# Altium PCB MidaSatsEPS.PcbDoc
Units mm, origin at the board's own origin, x right, y up, seen from the top; angles counter-clockwise.
Board outline 95.02 x 95 mm, 2 copper layers (Top Layer, Bottom Layer); 7 components, 5 nets, 44 pads, 0 vias.
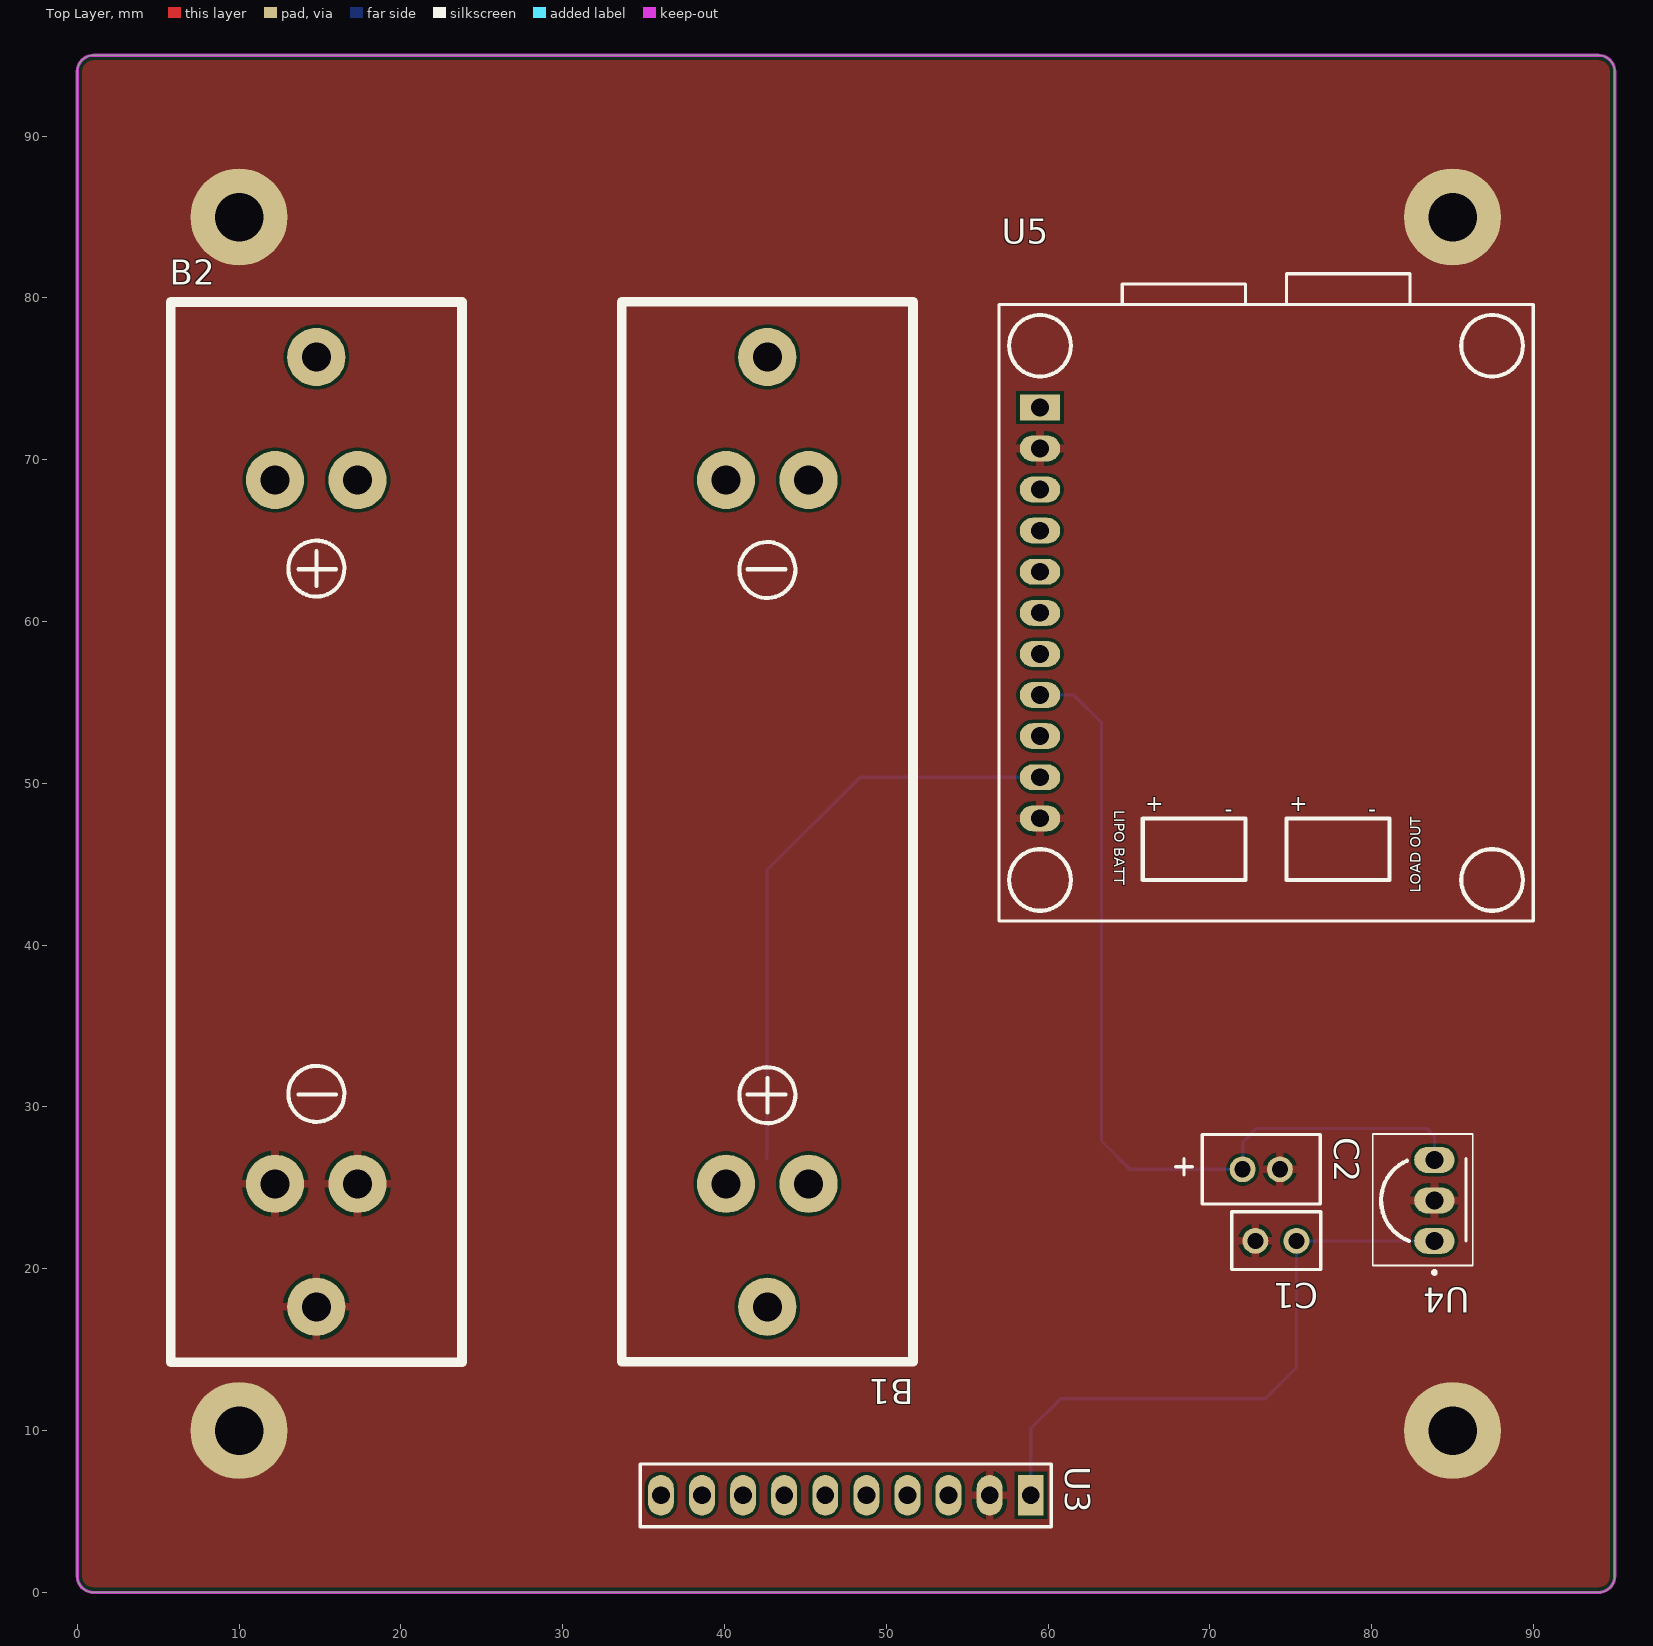
[diagram p0: Top Layer view]
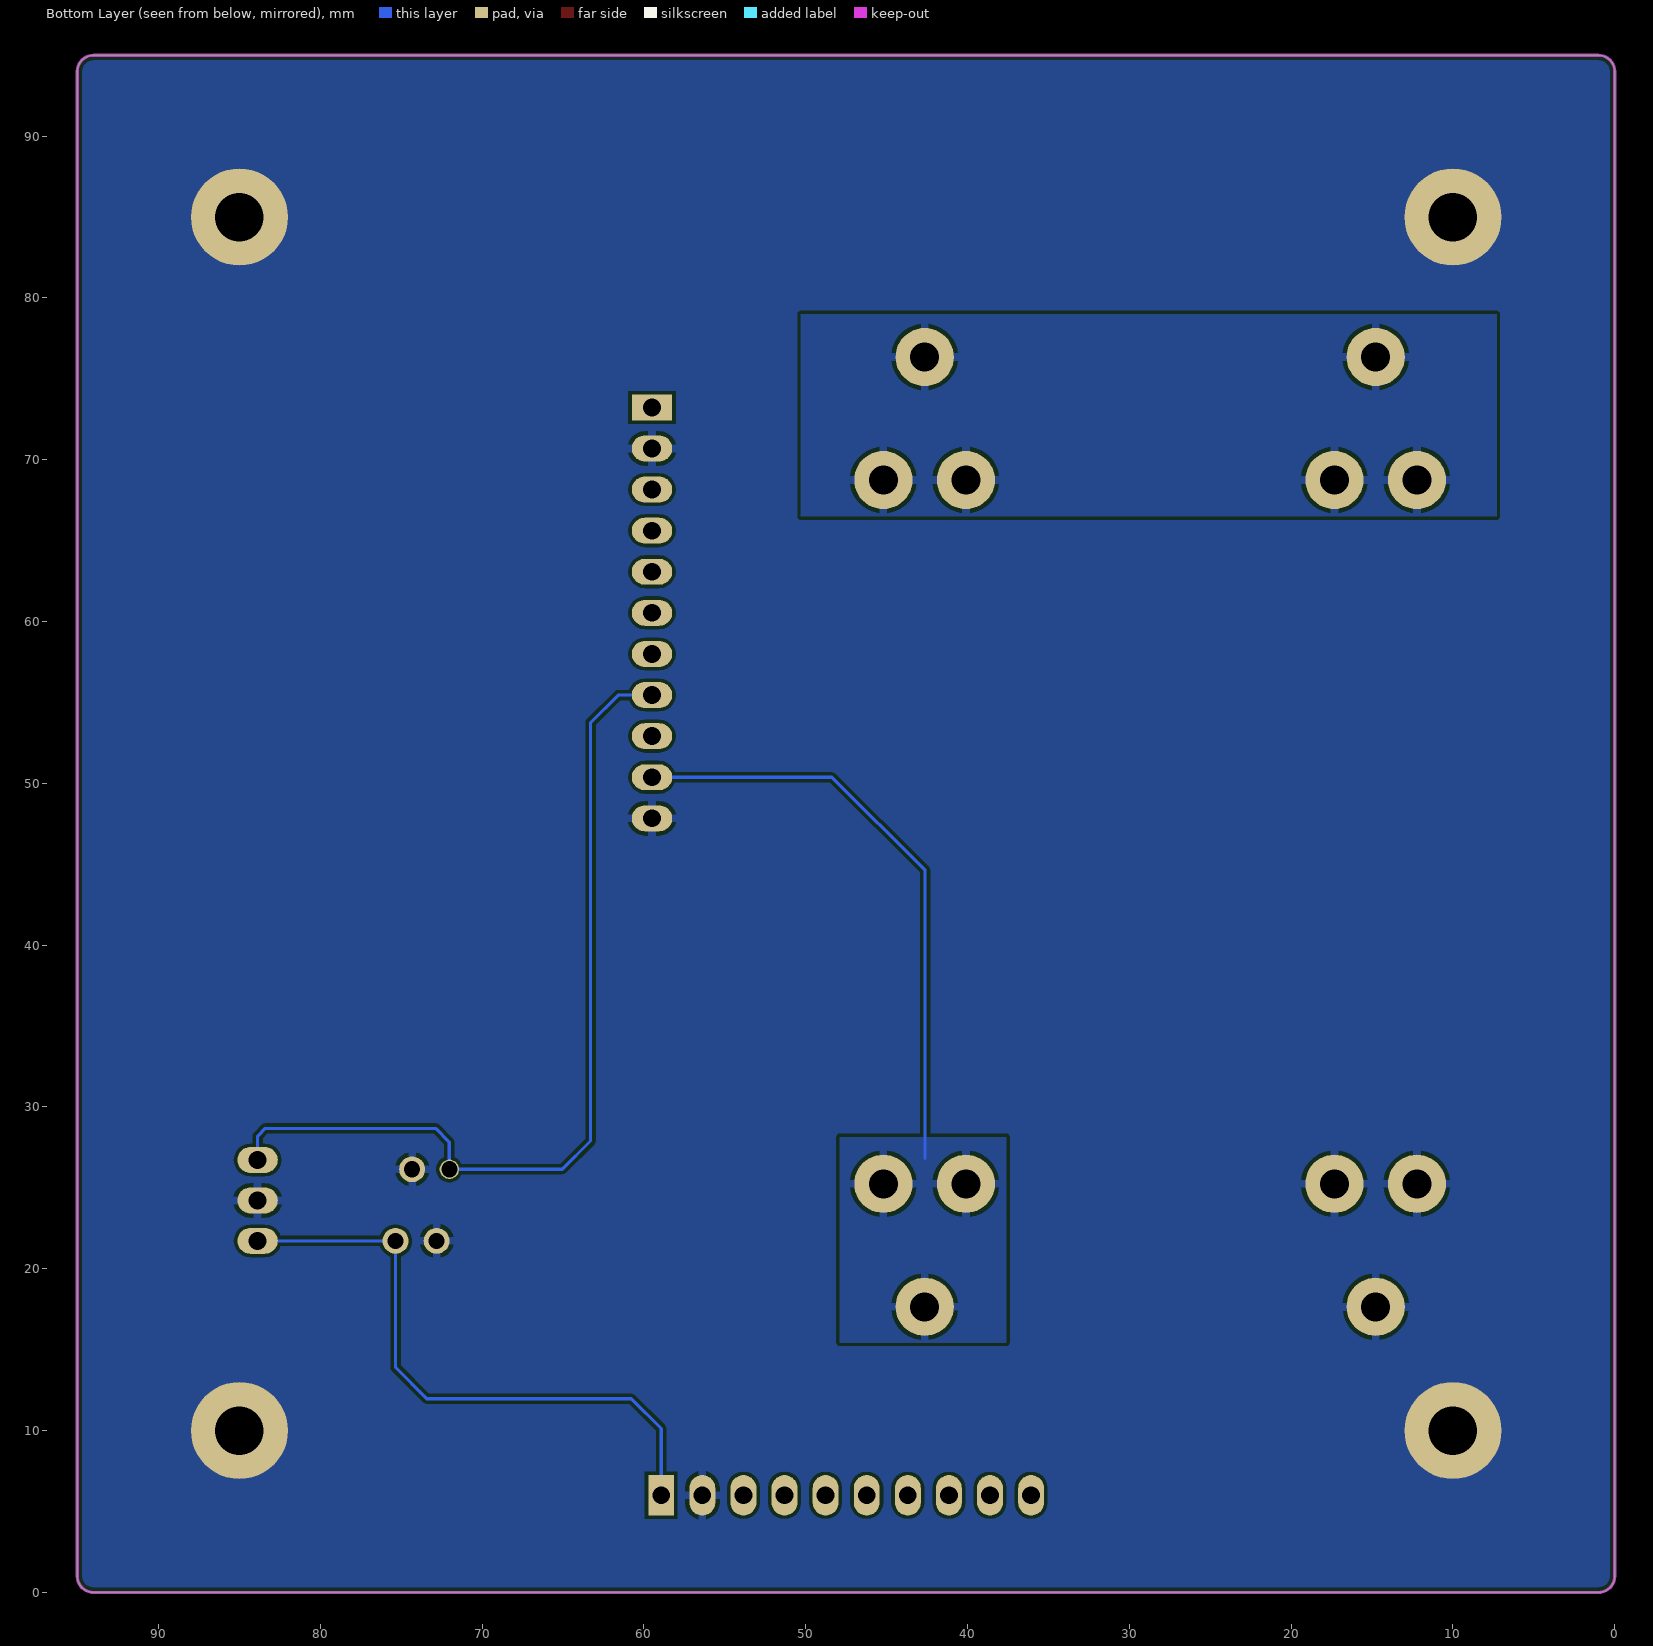
[diagram p1: Bottom Layer view, seen from below]

## Layer stack, top to bottom
Top Solder: solder mask 0.0102, Solder Resist, Dk 3.5
Top Layer: signal copper 0.0356
Dielectric 1: dielectric 0.32, FR-4, Dk 4.8
Bottom Layer: signal copper 0.0356
Bottom Solder: solder mask 0.0102, Solder Resist, Dk 3.5

## Board outline
0,1 0,94 cw(c1,94) 1,95 94.02,95 cw(c94.02,94) 95.02,94 95.02,1 cw(c94.02,1) 94.02,0 1,0 cw(c1,1)

## Design rules (kind name [scope] priority, off if disabled: settings)
BoardOutlineClearance [All] p1: gap=0.2 ignorepadtopadclearanceinfootprint=FALSE except(0.4: Arc-SplitBarrior Arc-SplitContinuation Track-SplitBarrior Track-SplitContinuation SMDPad-SplitBarrior SMDPad-SplitContinuation THPad-SplitBarrior THPad-SplitContinuation Via-SplitBarrior Via-SplitContinuation Fill-SplitBarrior Fill-SplitContinuation Poly-SplitBarrior Poly-SplitContinuation Region-SplitBarrior Region-SplitContinuation Text-SplitBarrior Text-SplitContinuation)
Clearance "Clearance Bottom Layer" [OnLayer('Bottom Layer')] p1: gap=0.203 ignorepadtopadclearanceinfootprint=TRUE except(0.254: Arc-Text Track-Text SMDPad-Text THPad-Text Via-Text Fill-Text Poly-Text Region-Text Text-Text)
Clearance "Clearance Top Layer" [OnLayer('Top Layer')] p2: gap=0.203 ignorepadtopadclearanceinfootprint=TRUE except(0.254: Arc-Text Track-Text SMDPad-Text THPad-Text Via-Text Fill-Text Poly-Text Region-Text Text-Text)
Clearance Clearance_1 [OnMid vs OnMid] p3: gap=0.254 ignorepadtopadclearanceinfootprint=FALSE except(0: Arc-Hole Track-Hole SMDPad-Hole THPad-Hole Via-Hole Fill-Hole Poly-Hole Region-Hole Text-Hole)
Clearance Clearance_2 [(ExistsOnLayer('Top Layer') Or ExistsOnLayer('Bottom Layer')) vs (ExistsOnLayer('Top Layer') Or ExistsOnLayer('Bottom Layer'))] p4: gap=0.254 ignorepadtopadclearanceinfootprint=FALSE except(0: Arc-Hole Track-Hole SMDPad-Hole THPad-Hole Via-Hole Fill-Hole Poly-Hole Region-Hole Text-Hole)
Clearance [All] p5: gap=0.2 ignorepadtopadclearanceinfootprint=FALSE except(0.089: Arc-Arc Arc-Track Arc-SMDPad Track-Track Track-SMDPad SMDPad-SMDPad; 0.127: Arc-Via Track-Via SMDPad-Via THPad-Via Via-Via; 0.254: Arc-Text Track-Text SMDPad-Text THPad-Text Via-Text Fill-Text Poly-Text Region-Text Text-Text)
HoleSize [All] p1: absolutevalues=TRUE maxlimit=6.3 minlimit=0.2 maxpercent=80.000 minpercent=20.000
MinimumAnnularRing [All] p1: minimumring=0.076
MinimumSolderMaskSliver [All] p1: minsoldermaskwidth=0.1
PolygonConnect PolygonConnect_1 [All] p1: thpad.connectstyle=Relief thpad.reliefconductorwidth=0.508 thpad.reliefentries=4 thpad.polygonreliefangle="90 Angle" thpad.airgapwidth=0.254 smdpad.connectstyle=Relief smdpad.reliefconductorwidth=0.508 smdpad.reliefentries=4 smdpad.polygonreliefangle="90 Angle" smdpad.airgapwidth=0.254 via.connectstyle=Direct via.reliefconductorwidth=0.508 via.reliefentries=4 via.polygonreliefangle="90 Angle" via.airgapwidth=0.254
RoutingCorners [All] p1: cornerstyle=Round minsetback=2.54 maxsetback=2.54
RoutingVias [All] p1: holewidth=0.5 width=1 viastyle="Through Hole" minholewidth=0.2 minwidth=0.45 maxholewidth=1 maxwidth=2
SilkToSilkClearance [All] p1: silktosilkclearance=0.1
SilkToSolderMaskClearance [IsPad] p1: minsilkscreentomaskgap=0.1 clearancetoexposedcopper=TRUE
SolderMaskExpansion [All] p1: expansion=0.102 istentingtop=FALSE
Width [All] p1: maxlimit=2.54 minlimit=0.089 preferedwidth=0.381
25 further rules are at their usual default settings.

## Components (designator, comment, footprint, x,y, rotation, side; value= is the part's Value field where it differs from the comment)
B1 "Keystone 54" "Keystone 54" 42.65,47 r180 top
B2 "Keystone 54" "Keystone 54" 14.775,47 r0 top
C1 "CAP 2.2UF" FA16X7R1E225KNU06 74.08,21.725 r180 top
C2 "CAP1UF" C330C105K5R5TA7301 73.175,26.15 r0 top value=1uF
U3 "Stackable Pin Bus" STACKABLE_PIN_BUS 47.5,6 r270 top
U4 "IC REG 5V" AP7381-50V-A 83.875,21.725 r180 top
U5 "BATT CHARG" 4755 59.5,73.24 r0 top

## Footprints (in the part's own frame and the unit in brackets; to place one, negate y for a bottom-side part, rotate by r counter-clockwise, add the part's x,y. Pads: shape width x height; smd on the part's side, far side on the other; paste and mask are expansions set on the pad)
4755 [mm]
  rect 2.5x1.6 hole 1.1: 1(0,0)
  oval 2.5x1.6 hole 1.1: 2(0,-2.54) 3(0,-5.08) 4(0,-7.62) 5(0,-10.16) 6(0,-12.7) 7(0,-15.24) 8(0,-17.78) 9(0,-20.32) 10(0,-22.86) 11(0,-25.4)
  silkscreen extent -2.54,-31.75 30.48,8.25, body extent -2.54,-31.8 30.48,9.37, height 12.57
AP7381-50V-A [mm]
  oval 2.5x1.6 hole 1.1: 1(0,0) 2(0,-2.5) 3(0,-5)
  silkscreen extent -2.37,-6.6 3.81,2.03, body extent -1.37,-5.2 2.29,0.2, height 9.83
C330C105K5R5TA7301 [mm]
  round 1.6 / inner round 1.6 / far side round 1.2 hole 1: 1(-1.15,0)
  round 1.6 hole 1: 2(1.15,0)
  silkscreen extent -5.28,-2.15 3.65,2.15, body extent -3.56,-2.04 3.55,2.04, height 7.23
FA16X7R1E225KNU06 [mm]
  round 1.6 hole 1: 1(-1.27,0) 2(1.27,0)
  silkscreen extent -2.77,-1.8 2.73,1.78, body extent -2.75,-1.75 2.75,1.75, height 4.5
"Keystone 54" [mm]
  round 3.6 hole 1.8: 1(-2.55,21.75) 1(0,29.35) 1(2.55,21.75) 2(-2.55,-21.75) 2(0,-29.35) 2(2.55,-21.75)
  silkscreen extent -9,-32.77 9,32.75, body extent -9.13,-32.93 9,32.91, height 18.3
STACKABLE_PIN_BUS [mm]
  rect 2.5x1.6 hole 1.1: 1(0,11.43)
  oval 2.5x1.6 hole 1.1: 2(0,8.89) 3(0,6.35) 4(0,3.81) 5(0,1.27) 6(0,-1.27) 7(0,-3.81) 8(0,-6.35) 9(0,-8.89) 10(0,-11.43)
  silkscreen extent -1.94,-12.7 1.95,12.7, body extent -1.25,-12.69 1.29,12.71, height 8

## Part data
B1 B2: library part 54, "Batteries/Accessories / BATT CONT CLIP 18650 1CEL PC PIN", Manufacturer="Keystone Electronics", Supplier Part Number=36-54-ND, Category="Batteries and Accessories", ComponentLink1Description=https://datasheet.ciiva.com:443/pdfs/VipMasterIC/IC/KEYC/KEYC-S-A0001371036/KEYC-S-A0001371130-1.pdf?src-supplier=IHS+Markit, ComponentLink1URL=https://datasheet.ciiva.com:443/pdfs/VipMasterIC/IC/KEYC/KEYC-S-A0001371036/KEYC-S-A0001371130-1.pdf?src-supplier=IHS+Markit, ComponentLink2Description=http://www.farnell.com/datasheets/1898890.pdf?src-supplier=Farnell, ComponentLink2URL=http://www.farnell.com/datasheets/1898890.pdf?src-supplier=Farnell, ComponentLink3Description=http://keyelco.com/userAssets/file/M65p11.pdf?src-supplier=Digikey, ComponentLink3URL=http://keyelco.com/userAssets/file/M65p11.pdf?src-supplier=Digikey, ComponentLink4Description=http://www.farnell.com/datasheets/1898890.pdf?src-supplier=Newark, ComponentLink4URL=http://www.farnell.com/datasheets/1898890.pdf?src-supplier=Newark, Manufacturer Part Number=54, Pricing="1=0,69, 25=0,5828, 100=0,55, 250=0,51576, 500=0,4587, 1000=0,3893, 2500=0,35554, 5000=0,32854 (USD)", RoHS=Yes, Stock=21286, Supplier=Digikey
C1: library part FA16X7R1E225KNU06, "Ceramic Capacitor, Multilayer, Ceramic, 25V, 10% +Tol, 10% -Tol, X7R, 15% TC, 2.2uF, Through Hole Mount", Capacitor Type=Ceramic, Manufacturer=TDK, Supplier Part Number=445-180433-1-ND, Category="Ceramic Capacitors", ComponentLink1Description=https://datasheet.ciiva.com:443/pdfs/VipMasterIC/IC/TDKC/TDKC-S-A0009903855/TDKC-S-A0009903855-1.pdf?src-supplier=IHS+Markit, ComponentLink1URL=https://datasheet.ciiva.com:443/pdfs/VipMasterIC/IC/TDKC/TDKC-S-A0009903855/TDKC-S-A0009903855-1.pdf?src-supplier=IHS+Markit, ComponentLink2Description=https://product.tdk.com/info/en/catalog/datasheets/leadmlcc_halogenfree_fa_en.pdf?src-supplier=Digikey, ComponentLink2URL=https://product.tdk.com/info/en/catalog/datasheets/leadmlcc_halogenfree_fa_en.pdf?src-supplier=Digikey, Dielectric Material=Ceramic, Manufacturer Part Number=FA16X7R1E225KNU06, Pins=2, Pricing="1=0,5, 10=0,332, 50=0,2448, 100=0,1993, 500=0,15736, 1000=0,13288 (USD)", Reach SVHC Compliant=Yes, RoHS=Yes, RoHS Compliant=Yes, Stock=7883, Supplier=Digikey
C2: library part C330C105K5R5TA7301, "Ceramic Capacitor, Multilayer, Ceramic, 50V, 10% +Tol, 10% -Tol, X7R, 15% TC, 1uF, Through Hole Mount", Capacitor Type=Ceramic, Case/Package=3015, Manufacturer=KEMET, Max Operating Temperature=125°C, Min Operating Temperature=-55°C, Package Shape=Rectangular, Package Style=RadialMeter, Rated DC Voltage (URdc)=50V, Supplier Part Number=399-9886-1-ND, Temperature Characteristics Code=X7R, Tolerance  (fill in as +-)=10%, Category="Ceramic Capacitors", ComponentLink1Description=https://datasheet.ciiva.com:443/pdfs/VipMasterIC/IC/KEME/KEME-S-A0009782347/KEME-S-A0009782347-1.pdf?src-supplier=IHS+Markit, ComponentLink1URL=https://datasheet.ciiva.com:443/pdfs/VipMasterIC/IC/KEME/KEME-S-A0009782347/KEME-S-A0009782347-1.pdf?src-supplier=IHS+Markit, ComponentLink2Description=https://datasheet.ciiva.com/6278/f3101-goldmax-6278031.pdf?src-supplier=Digikey, ComponentLink2URL=https://datasheet.ciiva.com/6278/f3101-goldmax-6278031.pdf?src-supplier=Digikey, Dielectric Material=Ceramic, Height=9.14mm, JESD-609 Code=e3, Length=7.62mm, Manufacturer Part Number=C330C105K5R5TA7301, Mounting Technology="Through Hole", Multilayer=Yes, Packaging="Tape and Reel", Pins=2, Pricing="1=0,48, 10=0,322, 50=0,2562, 100=0,2115, 500=0,16524 (USD)", Reach SVHC Compliant=Yes, RoHS=Yes, RoHS Compliant=Yes, Stock=95810, Supplier=Digikey, Terminal Finish=Nickel, Terminal Pitch=5.08mm, Termination=Wire, Tolerance (fill in as +-)=10%, Width=3.81mm
U3: library part "Barramento Empilhável", "10 pinos, Passo 2.54mm, Dimensões da barra 26x2x8mm"
U4: library part AP7381-50V-A, "Fixed Positive LDO Regulator", Manufacturer=Diodes, Peak Reflow Temperature (Cel)=260°C, Supplier Part Number=AP7381-50V-ADICT-ND, Time @ Peak Reflow Temperature-Max (s)=30s, ComponentLink1Description=https://datasheet.ciiva.com:443/pdfs/VipMasterIC/IC/DIOD/DIOD-S-A0009691348/DIOD-S-A0009865550-1.pdf?src-supplier=IHS+Markit, ComponentLink1URL=https://datasheet.ciiva.com:443/pdfs/VipMasterIC/IC/DIOD/DIOD-S-A0009691348/DIOD-S-A0009865550-1.pdf?src-supplier=IHS+Markit, ComponentLink2Description=https://www.diodes.com/assets/Datasheets/AP7381.pdf?src-supplier=Digikey, ComponentLink2URL=https://www.diodes.com/assets/Datasheets/AP7381.pdf?src-supplier=Digikey, Manufacturer Part Number=AP7381-50V-A, Pricing="1=0,46, 10=0,374, 25=0,3424, 100=0,2547, 250=0,2308, 500=0,19102, 1000=0,14326 (USD)", Reach SVHC Compliant=Yes, Regulator Type="FIXED POSITIVE SINGLE OUTPUT LDO REGULATOR", RoHS=Yes, RoHS Compliant=Yes, Stock=6439, Supplier=Digikey
U5: library part 4755, Manufacturer="Adafruit Industries", Supplier Part Number=1528-4755-ND, Manufacturer Part Number=4755, Pricing="1=14,95 (USD)", RoHS=No, Stock=308, Supplier=Digikey

## Free pads (board coordinates)
  round 6 hole 3: GND(10,10) GND(10,85) GND(85,10) GND(85,85)

## Nets (pads, with @x,y where several pads share a name; then routed paths per layer and width w, separated by ;. In a path a pad name is that pad's centre, name@x,y a point inside that pad or via, vN(x,y) a via of type N, cw(c..) or ccw(c..) an arc to the next point about the centre after c; other vN are vias at no path point)
"BAT CONN": B1.2 B2.1
GND: B2.2 C1.2 C2.2 pad.GND U3.2 U4.2 U5.2 U5.11
VBAT: B1.1 U5.10 | length 37.1
  Bottom Layer w0.2: 42.625,26.825 42.625,44.625 48.38,50.38 U5.10
VCC: C2.1 U4.3 U5.8 | length 55.4
  Bottom Layer w0.2: U5.8 61.59,55.46 63.3,53.75 63.3,27.9 65.05,26.15 C2.1 72.025,27.825 72.875,28.675 82.125,28.675 83.1,28.675 83.4,28.675 83.875,28.2 U4.3
VIN: C1.1 U3.1 U4.1 | length 38.5
  Bottom Layer w0.2: U3.1 58.93,10.13 60.775,11.975 73.425,11.975 75.35,13.9 75.35,18.125 C1.1 U4.1
pads on no net: U3.3 U3.4 U3.5 U3.6 U3.7 U3.8 U3.9 U3.10 U5.1 U5.3 U5.4 U5.5 U5.6 U5.7 U5.9

## Polygon pours and split planes (outlines as drawn)
GND on Bottom Layer "GND_BOTTOM" (solid, pour order 5): 0,95.015 0,0.215 0.1,0.115 95,0.115 95,94.815 94.9,94.915
VBAT on Bottom Layer "VBAT" (solid, pour order 4): 37.6,28.14 37.6,15.44 47.9,15.44 47.9,28.14
GND on Bottom Layer "GND_BAT" (solid, pour order 3): 9.7,28.14 9.7,15.84 9.6,15.74 20.3,15.74 20.3,28.14
"BAT CONN" on Bottom Layer "BAT_CONN" (solid, pour order 0): 7.3,79 7.3,66.5 50.3,66.5 50.3,79
GND on Top Layer "GND_TOP" (solid, pour order 6): 0,95.15 0,0.35 0.1,0.25 95,0.25 95,94.95 94.9,95.05

## Keep-outs
Keep-Out Layer:
  the board outline again, w0.2

## Text inside footprints (layer, text, board x,y; h text height)
U5: Top Overlay "-" at 70.904,47.944 h1; Top Overlay "-" at 79.794,47.944 h1; Top Overlay "+" at 76.036,48.277 h1; Top Overlay "+" at 67.146,48.277 h1; Top Overlay "LIPO BATT" at 64.104,48.336 h0.65 r270; Top Overlay "LOAD OUT" at 83.046,43.244 h0.65 r90